# Altium PCB V2_rampGen.PcbDoc
Units mil, origin at the board's own origin, x right, y up, seen from the top; angles counter-clockwise.
Board outline 6000 x 4000 mil, 2 copper layers (Top Layer, Bottom Layer); 21 components, 14 nets, 70 pads, 0 vias.
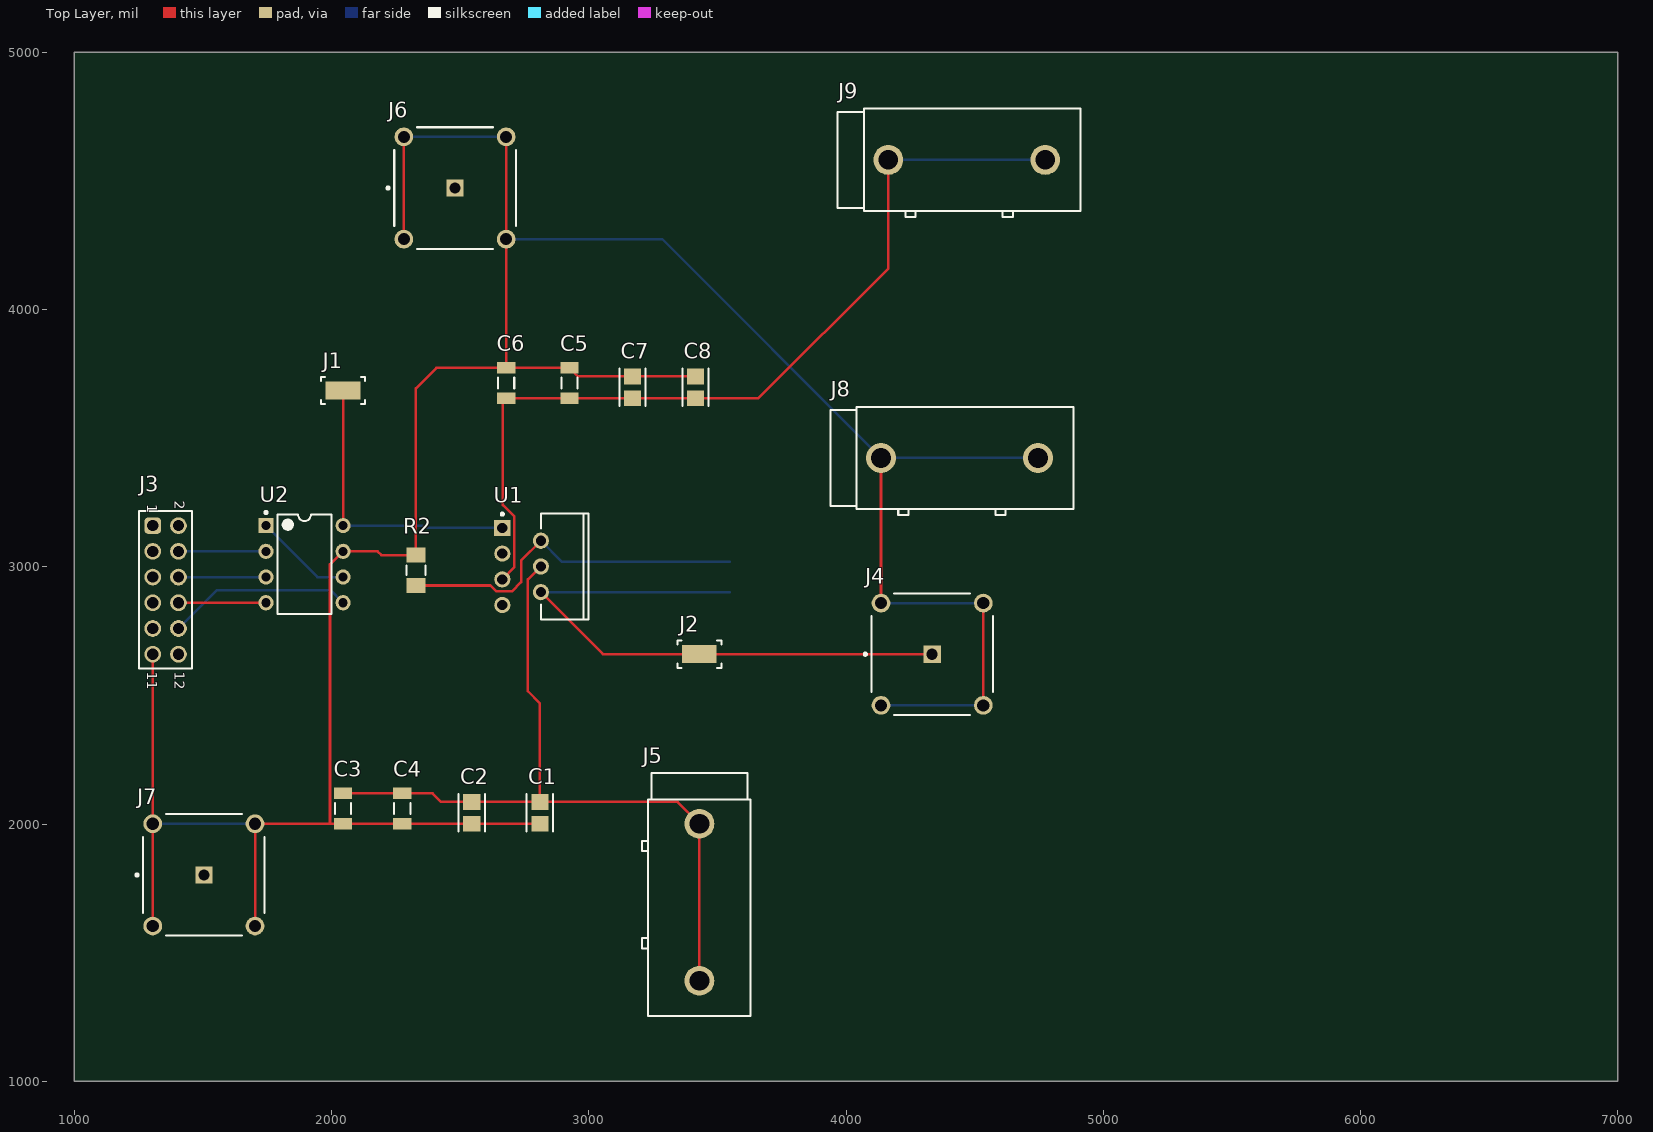
[diagram p0: Top Layer view]
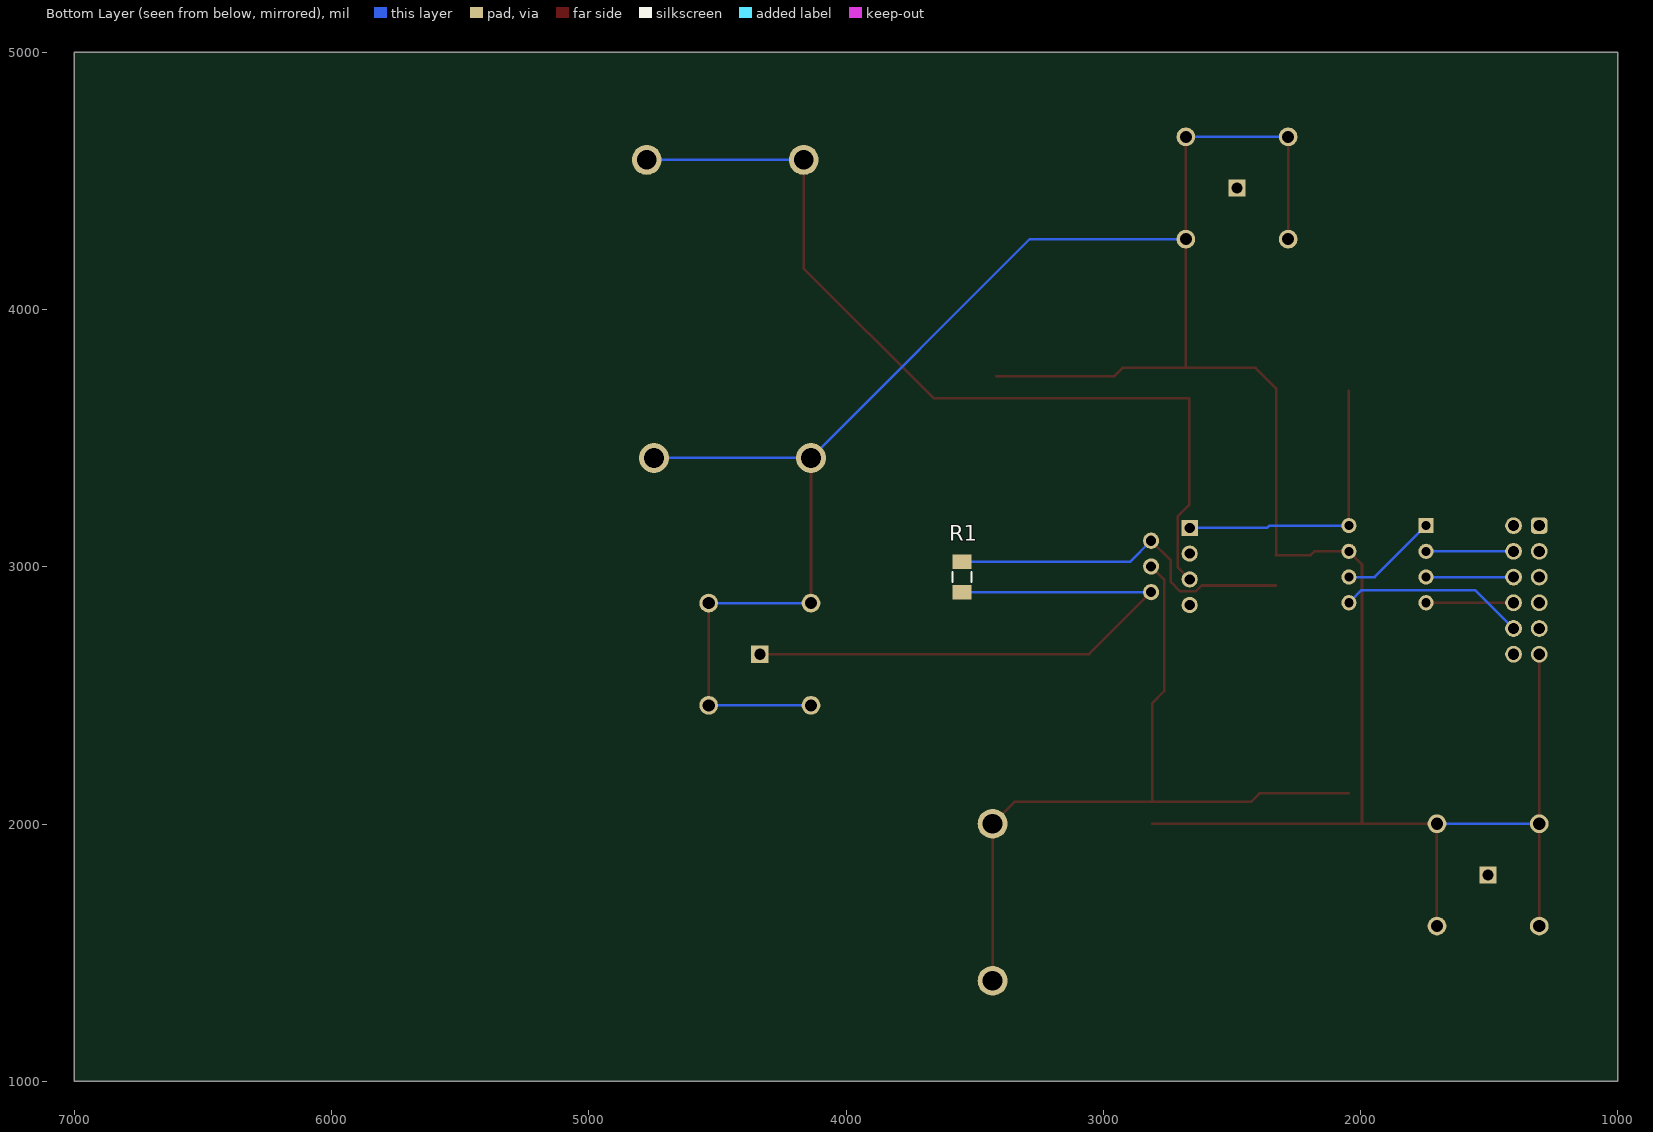
[diagram p1: Bottom Layer view, seen from below]
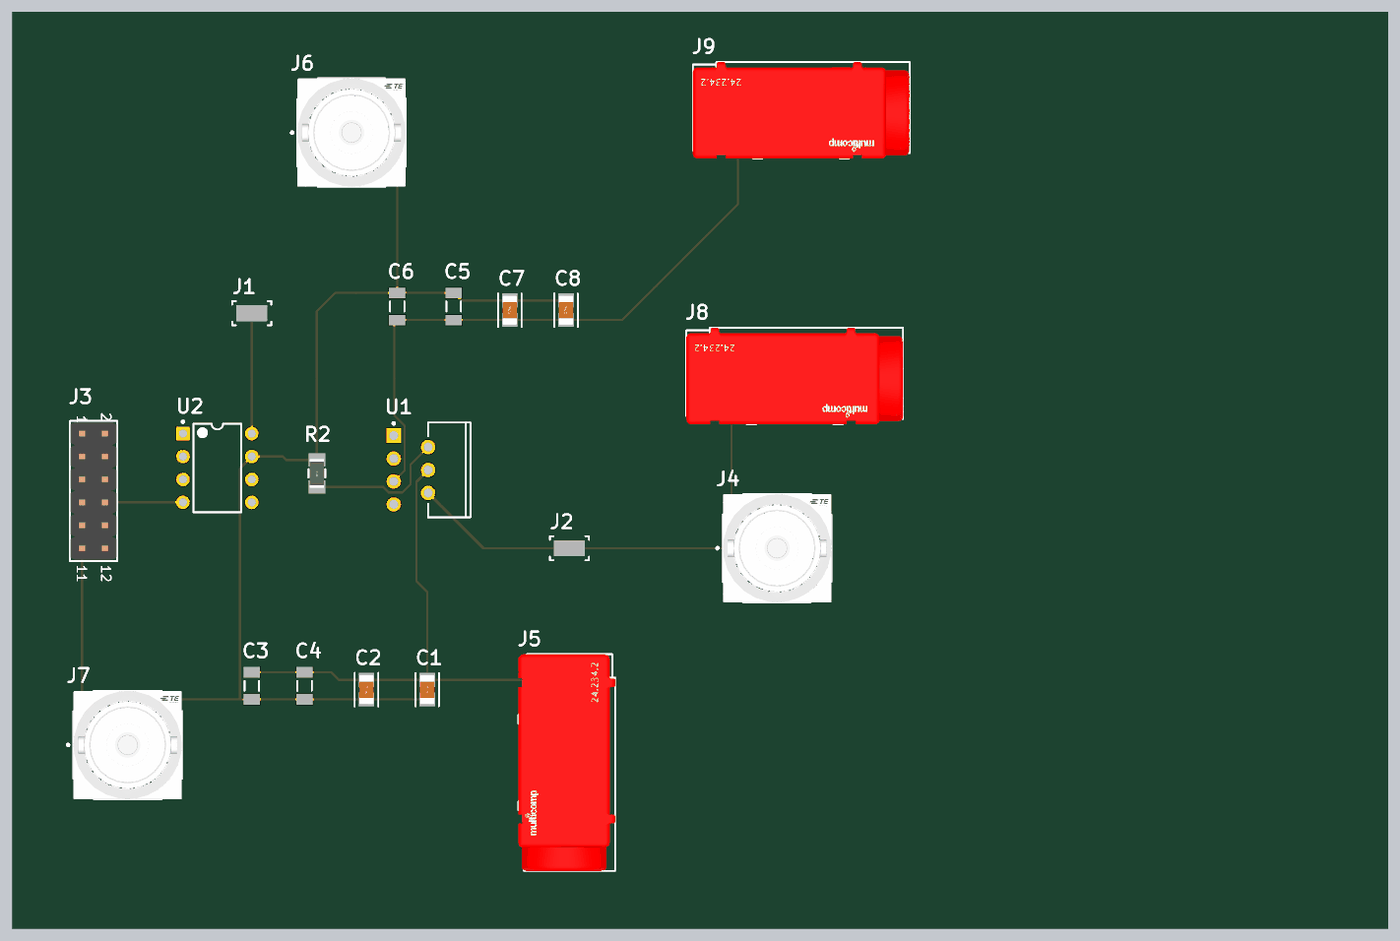
[diagram p2: 3D render of the assembled board from above, using the file's embedded part models]

## Layer stack, top to bottom
Top Solder: solder mask 0.4, Solder Resist, Dk 3.5
Top Layer: signal copper 1.4
Dielectric 1: dielectric 12.6, FR-4, Dk 4.8
Bottom Layer: signal copper 1.4
Bottom Solder: solder mask 0.4, Solder Resist, Dk 3.5

## Board outline
1000,1000 7000,1000 7000,5000 1000,5000

## Design rules (kind name [scope] priority, off if disabled: settings)
Clearance [All] p1: gap=10 ignorepadtopadclearanceinfootprint=FALSE except(0: Arc-Hole Track-Hole SMDPad-Hole THPad-Hole Via-Hole Fill-Hole Poly-Hole Region-Hole Text-Hole)
PolygonConnect [All] p1: connectstyle=Relief reliefconductorwidth=10 reliefentries=4 polygonreliefangle="90 Angle" airgapwidth=10
RoomDefinition V2_rampGen [InComponentClass('V2_rampGen')] p1: confinementstyle=ConfineIn formatcopy=TRUE lockcomponents=FALSE outline 1003.55,1026.18 5793.82,1026.18 5793.82,5011.18 1003.55,5011.18
RoutingVias [All] p1: holewidth=28 width=50 viastyle="Through Hole" minholewidth=28 minwidth=50 maxholewidth=28 maxwidth=50
SolderMaskExpansion [All] p1: expansion=4 istentingtop=FALSE
Width [All] p1: maxlimit=10 minlimit=10 preferedwidth=10
30 further rules are at their usual default settings.

## Components (designator, comment, footprint, x,y, rotation, side; value= is the part's Value field where it differs from the comment)
C1 "C3216JB1A106M160AA" FP-C3216-160-0_2-IPC_C 2810,2043.31 r270 top
C2 "C3216JB1A106M160AA" FP-C3216-160-0_2-IPC_C 2545,2043.31 r270 top
C3 "CAP 100pF 100V 1206(3216)" CAPC1206(3216)100_N 2045,2060 r90 top value=100pF
C4 "CAP 100pF 100V 1206(3216)" CAPC1206(3216)100_N 2275,2060 r90 top value=100pF
C5 "CAP 100pF 100V 1206(3216)" CAPC1206(3216)100_N 2925,3714.32 r270 top value=100pF
C6 "CAP 100pF 100V 1206(3216)" CAPC1206(3216)100_N 2678.82,3714.32 r270 top value=100pF
C7 "C3216JB1A106M160AA" FP-C3216-160-0_2-IPC_C 3170,3697.63 r90 top
C8 "C3216JB1A106M160AA" FP-C3216-160-0_2-IPC_C 3415,3697.63 r90 top
J1 "5015" FP-5015-MFG 2045,3685 r0 top
J2 "5015" FP-5015-MFG 3430,2660 r0 top
J3 "61301221121" 61301221121 1355,2910 r270 top
J4 "1-1337445-0" FP-1-1337445-0-MFG 4335,2660 r0 top
J5 "24.243.1" FP-24_243_1-MFG 3418.19,1725.35 r270 top
J6 "1-1337445-0" FP-1-1337445-0-MFG 2480,4472.36 r0 top
J7 "1-1337445-0" FP-1-1337445-0-MFG 1503.82,1802.13 r0 top
J8 "24.243.1" FP-24_243_1-MFG 4411.77,3411.18 r0 top
J9 "24.243.1" FP-24_243_1-MFG 4440,4570 r0 top
R1 "KTR18EZPJ102" FP-KTR18-IPC_A 3548.82,2960.29 r270 bottom
R2 "KTR18EZPJ102" FP-KTR18-IPC_A 2328.82,2986.18 r270 top
U1 "OPA452TA-1" KVT0007A 2738.82,3001.18 r0 top
U2 "MCP4921-E/P" PDIP300-P8 1895,3010 r0 top

## Footprints (in the part's own frame and the unit in brackets; to place one, negate y for a bottom-side part, rotate by r counter-clockwise, add the part's x,y. Pads: shape width x height; smd on the part's side, far side on the other; paste and mask are expansions set on the pad)
61301221121 [mm] "Pin Header, pitch 2.54 mm, THT, Vertical, dual row, 12p"
  rrect50% 1.65x1.65 hole 1.1: 1(-6.35,-1.27)
  round 1.65 hole 1.1: 2(-6.35,1.27) 3(-3.81,-1.27) 4(-3.81,1.27) 5(-1.27,-1.27) 6(-1.27,1.27) 7(1.27,-1.27) 8(1.27,1.27) 9(3.81,-1.27) 10(3.81,1.27) 11(6.35,-1.27) 12(6.35,1.27)
  silkscreen extent -7.77,-2.61 7.77,2.61, body extent -7.62,-2.54 7.62,2.54, height 8.59
CAPC1206(3216)100_N [mm] "Chip Capacitor, Body 3.2x1.6mm, Height 1mm, IPC Medium Density"
  rect 1.15x1.8 smd: 1(-1.5,0) 2(1.5,0)
  silkscreen extent -0.55,-0.8 0.55,0.8, body extent -1.7,-0.9 1.7,0.9, height 1
FP-1-1337445-0-MFG [mm]
  rect 1.7x1.7 hole 1.1 paste-2539.97 mask+0: 1(0,0)
  round 1.85 hole 1.2 paste-2539.97 mask+0: 2(-5.05,5.05) 3(5.05,5.05) 4(-5.05,-5.05) 5(5.05,-5.05)
  silkscreen extent -6.72,-6 6,6, body extent -6.1,-6.1 6.1,6.1, height 0.25
FP-24_243_1-MFG [mm]
  round 2.95 hole 1.95 paste-2539.97 mask+0: 1(-7,0.3) 1(8.5,0.3)
  silkscreen extent -12,-5.35 12,5.35, body extent -12.1,-5.45 12.1,5.45, height 0.25
FP-5015-MFG [mm]
  rect 3.43x1.78 smd paste+0 mask+0: 1(0,0)
  silkscreen extent -2.16,-1.34 2.17,1.34
FP-C3216-160-0_2-IPC_C [mil]
  rect 61.18x67.17 smd paste+0 mask+0: 1(-42.37,0) 2(42.37,0)
  silkscreen extent -73,-51 73,51, body extent -77,-39 77,39, height 10
FP-KTR18-IPC_A [mil]
  rect 57.31x73.16 smd paste+0 mask+0: 1(-59.1,0) 2(59.1,0)
  silkscreen extent -19,-37 19,37, body extent -63,-31 63,31, height 26
KVT0007A [mm] "FM, 7-Leads, Body 10.41 x 4.7mm, Pitch 1.27 mm"
  rect 1.6x1.6 hole 1: 1(-1.905,3.81)
  round 1.6 hole 1: 2(1.905,2.54) 3(-1.905,1.27) 4(1.905,0) 5(-1.905,-1.27) 6(1.905,-2.54) 7(-1.905,-3.81)
  silkscreen extent -2.03,-5.25 6.6,5.28, body extent -2.15,-5.23 6.6,5.23, height 21.43
PDIP300-P8 [mm] "8-Pin Plastic Dual In-Line Package (PDIP)"
  rect 1.5x1.5 hole 0.9: 1(-3.81,3.81)
  round 1.5 hole 0.9: 2(-3.81,1.27) 3(-3.81,-1.27) 4(-3.81,-3.81) 5(3.81,-3.81) 6(3.81,-1.27) 7(3.81,1.27) 8(3.81,3.81)
  silkscreen extent -3.93,-4.9 2.65,5.23, body extent -3.55,-4.9 3.55,4.9, height 4.32

## Part data
C1 C2 C7 C8: library part CMP-08246-004766-1, "Multilayer Ceramic Capacitors 10uF ±20% 10V JB SMD 1206", Capacitance=10uF, Case Code (Imperial)=1206, Case Code (Metric)=3216, Dielectric Material=Ceramic, Max Operating Temperature=85°C, Min Operating Temperature=-25°C, Package Quantity=2000, Tolerance=20%, Voltage Rating=10V, Case/Package=1206, Lead Free="Lead Free", Length=0.126inch, Mount="Surface Mount", Packaging="Cut Tape", RoHS Compliant=Yes, Series=C, Thickness=0.069inch, Voltage Rating (DC)=10V, Width=0.063inch
C3 C4 C5 C6: library part CMP-1037-01579-1, "CAP 100pF 100V ±1% 1206 (3216 Metric) Thickness 1mm SMD", Case-EIA=1206, Case-Metric=3216, Rated Voltage="100 V", Tolerance=Â±1%, Max Thickness="1 mm", Technology=SMT
J1 J2: library part CMP-2000-05183-2, "PC TEST POINT MINIATURE", Manufacturer=keystone, Automotive=No, Category=Conn, ComponentLink2Description=Datasheet, ComponentLink2URL=http://www.keyelco.com/product-pdf.cfm?p=1353, Conn Orientation=Straight, Contact Material=Silver, Device Class L1=Connectors, Device Class L2=unset, Device Class L3=unset, Digikey Description="PC TEST POINT MINIATURE", Height=1.65mm, Lead Free=Yes, Manufacturer Part Number=5015, Number Of Contacts=1, Octopart=https://octopart.com/5015-keystone-3822, Package=5015, RoHS=TRUE
J3: library part CMP-1502-01088-3, Color=Black, Contact Resistance=20mΩ, Current Rating=3A, Max Operating Temperature=105°C, Min Operating Temperature=-40°C, Operating Supply Voltage=250V, Connector Type="Male Pin", Contact Material=Copper, Contact Mating Length=5.9944mm, Contact Plating=Gold, Gender=Male, Height=8.89mm, Lead Pitch=2.54mm, Mount="Through Hole", NexarPartId=32855540, Number Of Contacts=12, Number of Pins=12, Number of Positions=12, Number of Rows=2, Orientation=Vertical, Packaging=Bulk, Pitch=2.54mm, REACH SVHC=Unknown, RoHS=Compliant, Row Spacing=2.54mm, Termination=Solder, Voltage Rating=250V
J4 J6 J7: library part CMP-03357-000006-1, "CONN BNC JACK STR 50 OHM PCB", Dielectric Material=PTFE, Frequency=4GHz, Insulation Resistance=5GR, Max Operating Temperature=165°C, Min Operating Temperature=-65°C, Operating Frequency="0 to 4Hz", Package Quantity=50, Body Material=Brass, Body Plating=Silver, Connector Type=BNC, Contact Material=Brass, Contact Plating=Silver, Depth=12mm, ELV=Compliant, Fastening Type=Bayonet, Gender=Female, Impedance=50R, Insulation Material=Polytetrafluoroethylene, Length=12mm, Material=Brass, Max Frequency=4GHz, Mount="Through Hole", Number of Positions=1, Orientation=Straight, Packaging=Bag, PCB Mount Retention=With, PCB Mounting Orientation=Vertical, PCB Thickness=0.126inch, Radiation Hardening=No, RoHS Compliant=Yes, Sealable="No (Without)", Series=BNC, Termination=Solder
J5 J8 J9: library part CMP-12400-000001-2, "Banana Test Connector, 4mm, Socket, PCB Mount, 24 A, 60 VDC, Silver Plated Contacts, Green", Current Rating=20A, Voltage Rating=30V, Contact Material=Brass, Contact Plating=Silver, Gender=Male, Length=24mm, REACH SVHC="No SVHC", RoHS Compliant=Yes, Termination=Solder, Voltage Rating (DC)=30V
R1 R2: library part CMP-08839-031408-1, "Res Thick Film 1206 1kΩ 5% 0.1W ±200ppm/°C Automotive Paper T/R", Case Code (Imperial)=1206, Case Code (Metric)=3216, Max Operating Temperature=155°C, Max Power Dissipation=250mW, Min Operating Temperature=-55°C, Package Quantity=1, Resistance=1kR, Resistor Type="Thick Film", Temperature Coefficient=200ppm/°C, Tolerance=5%, Case/Package=1206, Features="Automotive AEC-Q200", Height=0.026inch, Lead Free="Lead Free", Length=0.126inch, Mount="Surface Mount", Number of Terminations=2, Packaging="Tape and Reel", Power Rating=250mW, RoHS Compliant=Yes, Series=KTR, Size Code=1206, Width=0.063inch
U1: library part CMP-0272-03697-4, "Operational Amplifier, 20 to 80 V, -40 to 125 degC, 7-pin FM (KVT7), Green (RoHS & no Sb/Br)", Manufacturer="Texas Instruments", Rating=Catalog, Total Supply Voltage(Max)(+5V is 5, +/-5V is 10)=80, Total Supply Voltage(Min)(+5V is 5, +/-5V is 10)=20, CMRR(Min)(dB)=86, ComponentLink1Description="Manufacturer URL", ComponentLink1URL=http://www.ti.com/, ComponentLink2Description=Datasheet, ComponentLink2URL=http://www.ti.com/lit/ds/symlink/opa452.pdf, ComponentLink3Description="Package Specification", ComponentLink3URL=http://www.ti.com/litv/pdf/mpzf004, DatasheetVersion=SBOS127C, Eco-Plan="Green (RoHS & no Sb/Br)", GBW(Typ)(MHz)=1.8, IIB(Max)(pA)=100, Iq per channel(Max)(mA)=6.5, Mounting Technology="Through Hole", Number of Channels=1, Offset Drift(Typ)(uV/C)=5, PackageDescription="7-Pin Plastic Flange Mount, Body 10.16 x 4.495 mm, Pitch 1.27 mm", PackageReference=KVT0007A, PackageVersion="4204912/A, 01/2003", Packing=TUBE, PartNumber=OPA452TA-1, RevisionNote="Footprint corrected", Slew Rate(Typ)(V/us)=10, Sub Family="High Output Current Amplifier (>=50mA), High Supply Voltage Amplifier (>=30V), Precision Amplifier", Vio (25C)(Max)(mV)=3
U2: library part CMP-0188-00217-2, "12-Bit DAC with SPI Interface, 8-Pin PDIP, Extended Temperature", Code_JEDEC=MS-001, ComponentLink1Description="Manufacturer URL", ComponentLink1URL=http://www.microchip.com/, ComponentLink2Description=Datasheet, ComponentLink2URL=http://ww1.microchip.com/downloads/en/DeviceDoc/22248a.pdf, ComponentLink3Description="Package Specification", ComponentLink3URL=http://www.microchip.com/stellent/groups/techpub_sg/documents/packagingspec/en012702.pdf, DatasheetVersion="revA, Apr-2010", PackageDescription="8-Lead Plastic Dual In-Line (P) - 300 mil Body [PDIP]", PackageReference=PDIP300-P8, PackageVersion="revBB, Aug-2009", RevisionNote="URLs added. DatasheetVersion updated. Sch updated."

## Nets (pads, with @x,y where several pads share a name; then routed paths per layer and width w, separated by ;. In a path a pad name is that pad's centre, name@x,y a point inside that pad or via, vN(x,y) a via of type N, cw(c..) or ccw(c..) an arc to the next point about the centre after c; other vN are vias at no path point)
70V: C1.1 C2.1 C3.2 C4.2 J5.1 U1.4 | length 3000.2
  Top Layer w10: C3.2 C4.2 2393,2119.06 2426.38,2085.68 C2.1 C1.1 ; U1.4 2763,2950.36 2763,2516 2810,2469 C1.1 ; J5.1@3430,1390.71 3430,2000.94 3345.27,2085.68 C1.1
+5: J3.2
-10V: C5.2 C6.2 C7.1 C8.1 J9.1 U1.5 | length 3481.6
  Top Layer w10: U1.5 2711,2998.36 2711,3195 2666,3240 2666,3655.27 C6.2 C5.2 C7.1 C8.1 3659.27,3655.27 4164.41,4160.41 J9.1@4164.41,4581.81
  Bottom Layer w10: J9.1@4164.41,4581.81 J9.1@4774.65,4581.81
Arduino_pass0: J6.1
Arduino_pass1: J7.1
GND: C1.2 C2.2 C3.1 C4.1 C5.1 C6.1 C7.2 C8.2 J3.11 J4.2 J4.3 J4.4 J4.5 J6.2 J6.3 J6.4 J6.5 J7.2 J7.3 J7.4 J7.5 J8.1 R2.1 U2.7 | length 11981.6
  Top Layer w10: J7.4 J7.2 J3.11 ; J7.5 J7.3 1994,2000.94 ; J6.4 J6.2 ; R2.1 R2.1@2328,3045.29 ; J6.3 J6.5 C6.1 ; C1.2 C2.2 2409,2000.94 C4.1 2159,2000.95 C3.1 1994,2000.94 ; C8.2 C7.2 2958.38,3740 C5.1 C6.1 ; J4.2 J8.1@4136.18,3422.99 ; J4.5 J4.3 ; 1994,2000.94 1994,3009 U2.7 2179,3060 2193.71,3045.29 R2.1@2328,3045.29 ; R2.1@2328,3045.29 2328,3693.38 2408,3773.38 C6.1
  Bottom Layer w10: J7.2 J7.3 ; J6.2 J6.3 ; J6.5 3285.63,4273.55 4136.18,3422.99 J8.1@4746.42,3422.99 ; J4.4 J4.5 ; J4.2 J4.3
NetJ1_1: J1.1 U1.1 U2.8 | length 1147.5
  Top Layer w10: U2.8 J1.1
  Bottom Layer w10: U2.8 2354,3160 2362.82,3151.18 U1.1
NetJ2_1: J2.1 J4.1 R1.2 U1.6 | length 2356.1
  Top Layer w10: U1.6 3055,2660 J2.1 J4.1
  Bottom Layer w10: U1.6 R1.2
NetJ3_4: J3.4 U2.2 | length 340
  Bottom Layer w10: J3.4 U2.2
NetJ3_6: J3.6 U2.3 | length 340
  Bottom Layer w10: J3.6 U2.3
NetJ3_8: J3.8 U2.4 | length 340
  Top Layer w10: J3.8 U2.4
NetJ3_10: J3.10 U2.5 | length 722
  Bottom Layer w10: J3.10 1554,2909 1996,2909 U2.5
NetR1_1: R1.1 R2.2 U1.2 | length 1394.5
  Top Layer w10: R2.2 2617.92,2927.08 2641,2904 2701,2904 2737,2940 2737,3024.36 U1.2
  Bottom Layer w10: U1.2 2895.61,3019.39 R1.1
NetU2_1: U2.1 U2.6 | length 382.8
  Bottom Layer w10: U2.1 1945,2960 U2.6
pads on no net: J3.1 J3.3 J3.5 J3.7 J3.9 J3.12 U1.3 U1.7

## Text inside footprints (layer, text, board x,y; h text height)
J3: Top Overlay "2" at 1390.43,3255.67 h40 r270; Top Overlay "1" at 1284.13,3243.86 h40 r270; Top Overlay "11" at 1284.13,2591.89 h40 r270; Top Overlay "12" at 1390.43,2591.89 h40 r270